# EAGLE board receiving_end (EAGLE 6.3)
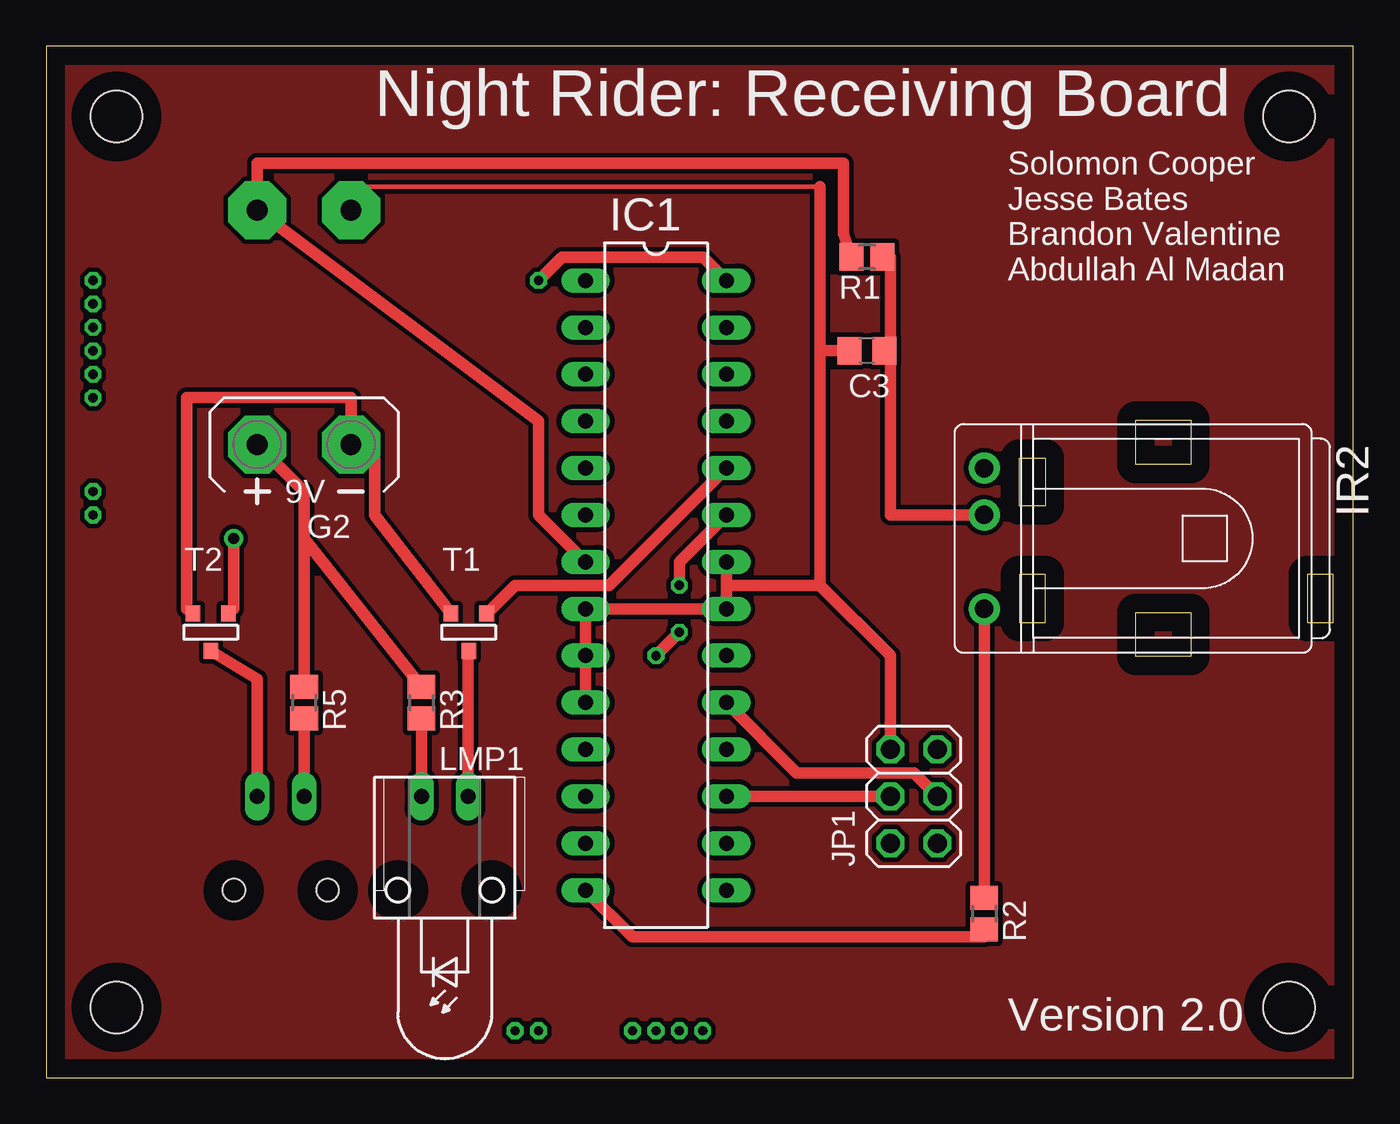
[diagram p0: board, top side]
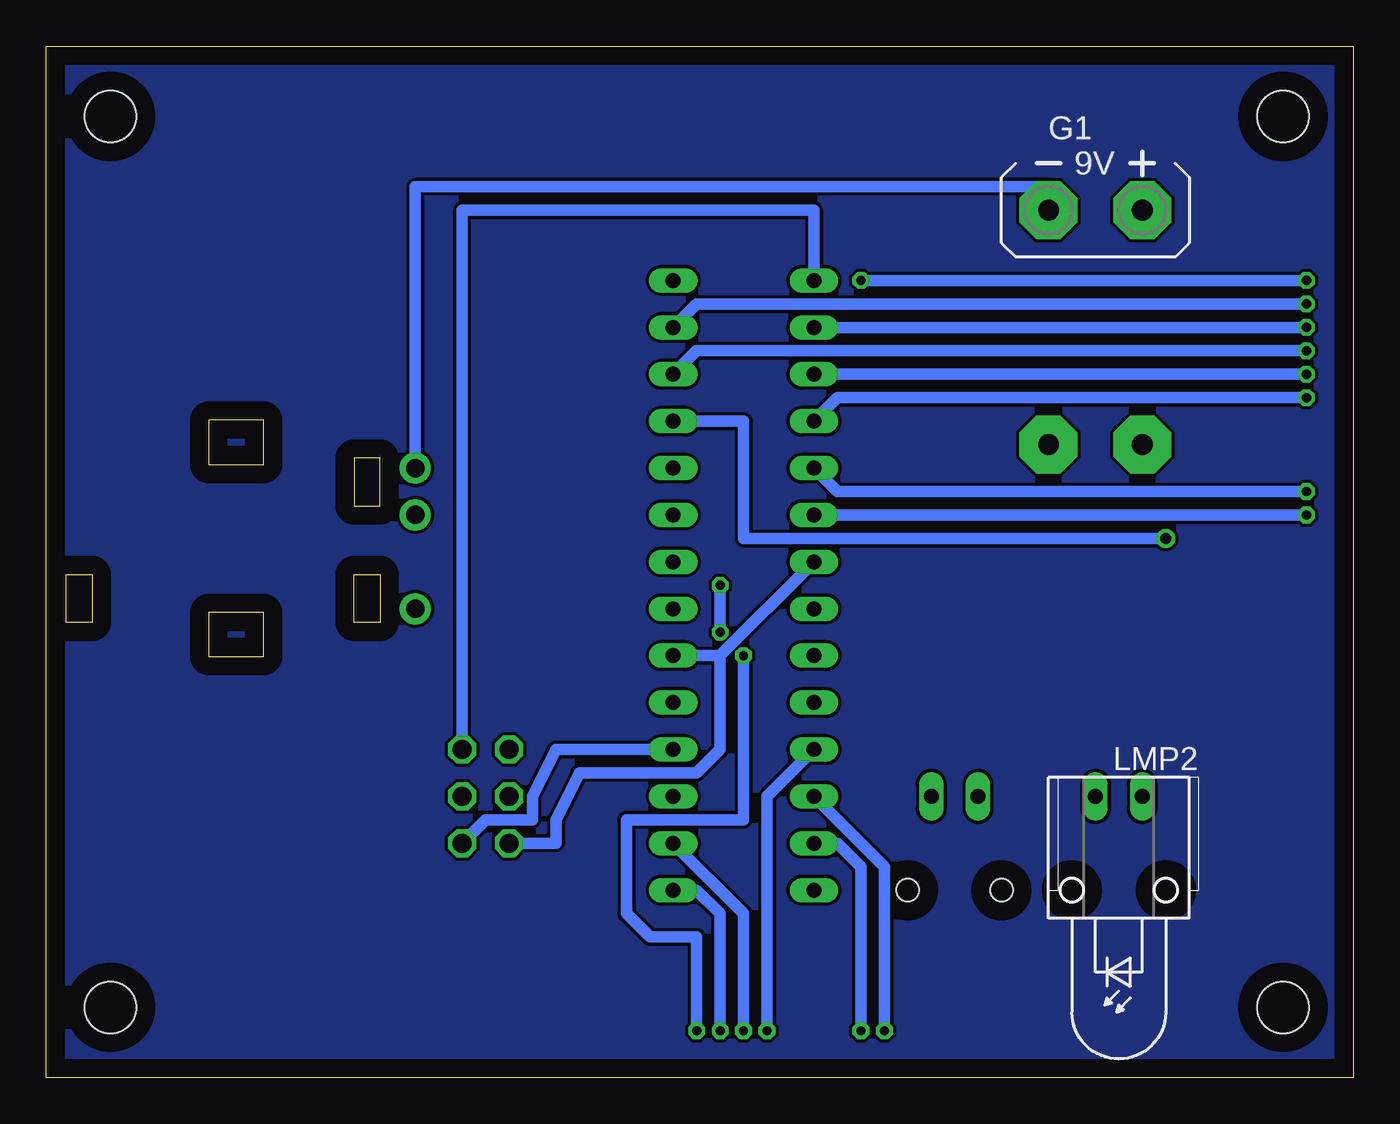
[diagram p1: board, bottom side, seen from below]

Size 70.79 x 55.87 mm. Coordinates in mm from the lower left corner, seen from the top.
Outline: 0,0 70.79,0 70.79,55.87 0,55.87 0,0
Copper layers (1+16): Top 1mm / dielectric 1.5mm / Bottom 1mm
Design rules "default *": minimum track width 10mil, minimum drill 0.5mil, track to track 7mil, track to pad 7mil, pad to pad 7mil, via to via 7mil, smd to smd 7mil, copper to edge 40mil, drill to drill 8mil, minimum pad ring 10mil, minimum via ring 8mil, stop-mask expansion 4mil, vias tented up to drill 0mil, thermal gap 10mil
Holes 2.8 mm at 3.81,52.07 67.31,52.07 67.31,3.81 3.81,3.81

## Footprints (pad centres in the part's own frame; a part is rotated, then mirrored left to right if it is on the bottom)
C0805 = smd 1.3 x 1.5: 1 -0.95,0; 2 0.95,0
AB9V = drill 1.118 pad 3.15 octagon: + 0,2.54; - 0,-2.54
DIL28-3 = drill 0.813 long: 1 -16.51,-3.81; 2 -13.97,-3.81; 3 -11.43,-3.81; 4 -8.89,-3.81; 5 -6.35,-3.81; 6 -3.81,-3.81; 7 -1.27,-3.81; 8 1.27,-3.81; 9 3.81,-3.81; 10 6.35,-3.81; 11 8.89,-3.81; 12 11.43,-3.81; 13 13.97,-3.81; 14 16.51,-3.81; 15 16.51,3.81; 16 13.97,3.81; 17 11.43,3.81; 18 8.89,3.81; 19 6.35,3.81; 20 3.81,3.81; 21 1.27,3.81; 22 -1.27,3.81; 23 -3.81,3.81; 24 -6.35,3.81; 25 -8.89,3.81; 26 -11.43,3.81; 27 -13.97,3.81; 28 -16.51,3.81
TSOP17_TB1 = drill 1 pad 1.676: GND 0,-3.81; VO 0,3.81; VS 0,-1.27
2X03 = drill 1.016 octagon: 1 -2.54,-1.27; 2 -2.54,1.27; 3 0,-1.27; 4 0,1.27; 5 2.54,-1.27; 6 2.54,1.27
LDH-5R = drill 0.813 long: 1 -1.27,-5.08; 2 1.27,-5.08 | hole 1.219: 2.54,0; -2.54,0
R0805 = smd 1.3 x 1.5: 1 -0.85,0; 2 0.85,0
SOT-23 = smd 0.787 x 0.889: 1 0.025,-1.016; 2 -0.94,1.016; 3 0.991,1.016

## Placement (x,y rotation side)
C3  TBD  [C0805]  44.45,39.37 180 top
G1  AB9V  [AB9V]  13.97,46.99 270 bottom
G2  AB9V  [AB9V]  13.97,34.29 90 top
IC1  MEGA8-P  [DIL28-3]  33.02,26.67 270 top
IR2  TSOP1756TB1  [TSOP17_TB1]  50.8,29.21 180 top
JP1  [2X03]  46.99,15.24 90 top
LMP1  [LDH-5R]  21.59,10.16 180 top
LMP2  [LDH-5R]  12.7,10.16 180 bottom
R1  TBD  [R0805]  44.45,44.45 180 top
R2  TBD  [R0805]  50.8,8.89 270 top
R3  0  [R0805]  20.32,20.32 270 top
R5  0  [R0805]  13.97,20.32 270 top
T1  [SOT-23]  22.86,24.13 0 top
T2  [SOT-23]  8.89,24.13 0 top

## Library data of the parts
C3 = rcl
G1 G2 = battery
IC1 = atmel; OC_FARNELL: unknown; OC_NEWARK: unknown
IR2 = telefunken; OC_FARNELL: unknown; OC_NEWARK: unknown
JP1 = pinhead
LMP1 LMP2 = special
R1-R3 R5 = resistor
T1 T2 = solomon_library; OC_FARNELL: unknown; OC_NEWARK: unknown

## Nets
GND: C3.2 G1.- IC1.8 IC1.9 IC1.10 IC1.21 IC1.22 IR2.GND JP1.6
N$1: IC1.25 T2.3
N$2: IC1.26
N$3: IC1.11
N$4: IR2.VO R2.1
N$5: LMP1.1 T1.1
N$6: LMP1.2 R3.2
N$7: LMP2.1 T2.1
N$8: G2.- T1.2 T2.2
N$9: G2.+ R3.1 R5.1
N$10: LMP2.2 R5.2
N$11: IC1.24 T1.3
N$12: C3.1 IR2.VS R1.1
N$15: IC1.23
N$16: IC1.27
N$17: IC1.28
N$18: IC1.2
N$19: IC1.3
N$20: IC1.4
N$21: IC1.5
N$22: IC1.6
N$23: IC1.12
N$24: IC1.13
N$25: IC1.14 R2.2
N$26: IC1.15
N$27: IC1.16
N$28: IC1.17 JP1.4
N$29: IC1.18 JP1.1
N$30: IC1.19 JP1.3
N$35: IC1.1 JP1.5
VCC: G1.+ IC1.7 IC1.20 JP1.2 R1.2

## Tracks (layer width: path | path; a pad name or v marks a point on that pad's centre or on a via)
GND
  Top 0.254: G1.- 16.51,48.26 41.91,48.26
  Top 0.61: IC1.10 IC1.9 IC1.8 IC1.21 36.83,26.67 | IC1.22 36.83,26.67 | 36.83,26.67 41.91,26.67 | 41.91,26.67 45.72,22.86 JP1.6 | 41.91,48.26 41.91,39.37 | 41.91,39.37 41.91,26.67 | 41.91,39.37 C3.2
  Bottom 0.61: IR2.GND 50.8,48.26 16.51,48.26 G1.-
N$1  (via drill 0.61)
  Top 0.254: 10.16,25.4 T2.3
  Top 0.61: v10.16,29.21 10.16,25.4
  Bottom 0.61: v10.16,29.21 33.02,29.21 33.02,35.56 IC1.25
N$2  (via drill 0.5)
  Bottom 0.61: IC1.26 35.56,39.37 v2.54,39.37
N$3  (via drill 0.5)
  Bottom 0.61: IC1.11 31.75,15.24 v31.75,2.54
N$4
  Top 0.61: IR2.VO R2.1
N$5
  Top 0.254: 22.86,22.86 T1.1
  Top 0.61: LMP1.1 22.86,22.86
N$6
  Top 0.61: LMP1.2 R3.2
N$7
  Top 0.61: LMP2.1 11.43,21.59 T2.1
N$8
  Top 0.254: 7.62,25.4 T2.2
  Top 0.61: 7.62,25.4 7.62,36.83 16.51,36.83 G2.- 17.78,34.29 17.78,30.48 T1.2
N$9
  Top 0.61: 13.97,29.21 R5.1 | G2.+ 13.97,31.75 13.97,30.48 13.97,29.21 | 13.97,29.21 R3.1
N$10
  Top 0.61: LMP2.2 R5.2
N$11
  Top 0.254: 24.13,25.4 T1.3
  Top 0.61: 24.13,25.4 25.4,26.67 30.48,26.67 IC1.24
N$12
  Top 0.254: 45.72,44.45 R1.1 | 45.72,39.37 C3.1
  Top 0.61: 45.72,44.45 45.72,39.37 45.72,30.48 IR2.VS
N$13
  pour Bottom: 0,0 71.12,0 71.12,55.88 0,55.88
N$14
  pour Top (isolate 0.254): 0,55.88 71.12,55.88 71.12,0 0,0
N$15  (via drill 0.5)
  Top 0.61: IC1.23 34.29,27.94 v34.29,26.67 | v34.29,24.13 v33.02,22.86
  Bottom 0.61: v34.29,26.67 v34.29,24.13 | v33.02,22.86 33.02,13.97 39.37,13.97 39.37,8.89 38.1,7.62 35.56,7.62 v35.56,2.54
N$16  (via drill 0.5)
  Bottom 0.61: IC1.27 35.56,41.91 v2.54,41.91
N$17  (via drill 0.5)
  Top 0.61: IC1.28 35.56,44.45 27.94,44.45 v26.67,43.18
  Bottom 0.61: v26.67,43.18 v2.54,43.18
N$18  (via drill 0.5)
  Bottom 0.61: IC1.2 v2.54,40.64
N$19  (via drill 0.5)
  Bottom 0.61: IC1.3 v2.54,38.1
N$20  (via drill 0.5)
  Bottom 0.61: IC1.4 27.94,36.83 v2.54,36.83
N$21  (via drill 0.5)
  Bottom 0.61: IC1.5 27.94,31.75 v2.54,31.75
N$22  (via drill 0.5)
  Bottom 0.61: IC1.6 v2.54,30.48
N$23  (via drill 0.5)
  Bottom 0.61: IC1.12 25.4,11.43 v25.4,2.54
N$24  (via drill 0.5)
  Bottom 0.61: IC1.13 27.94,12.7 26.67,11.43 v26.67,2.54
N$25
  Top 0.254: 50.8,7.62 R2.2
  Top 0.61: 50.8,7.62 31.75,7.62 IC1.14
N$26  (via drill 0.5)
  Bottom 0.61: IC1.15 35.56,10.16 34.29,8.89 v34.29,2.54
N$27  (via drill 0.5)
  Bottom 0.61: IC1.16 33.02,8.89 v33.02,2.54
N$28
  Top 0.61: JP1.4 IC1.17
N$29
  Bottom 0.61: IC1.18 43.18,17.78 44.45,15.24 44.45,13.97 46.99,13.97 JP1.1
N$30
  Top 0.61: IC1.19 40.64,16.51 46.99,16.51 JP1.3
N$35
  Bottom 0.61: IC1.1 29.21,46.99 48.26,46.99 JP1.5
VCC
  Top 0.61: R1.2 43.18,45.72 43.18,49.53 11.43,49.53 G1.+ 26.67,35.56 26.67,30.48 IC1.7
  Bottom 0.61: 34.29,22.86 IC1.7 | JP1.2 43.18,12.7 43.18,13.97 41.91,16.51 35.56,16.51 34.29,17.78 34.29,22.86 | IC1.20 34.29,22.86

## Text on the board
tPlace: Night Rider: Receiving Board | Solomon Cooper / Jesse Bates / Brandon Valentine / Abdullah Al Madan | Version 2.0